# Altium PCB PCB_AUPWSC.PcbDoc
Units mm, origin at the board's own origin, x right, y up, seen from the top; angles counter-clockwise.
Board outline 55 x 45 mm, 4 copper layers (L1, L2, L3, L4), stack 0.603 mm thick; 47 components, 20 nets, 119 pads, 32 vias.
Unrouted connection lines stored in the file: 1.
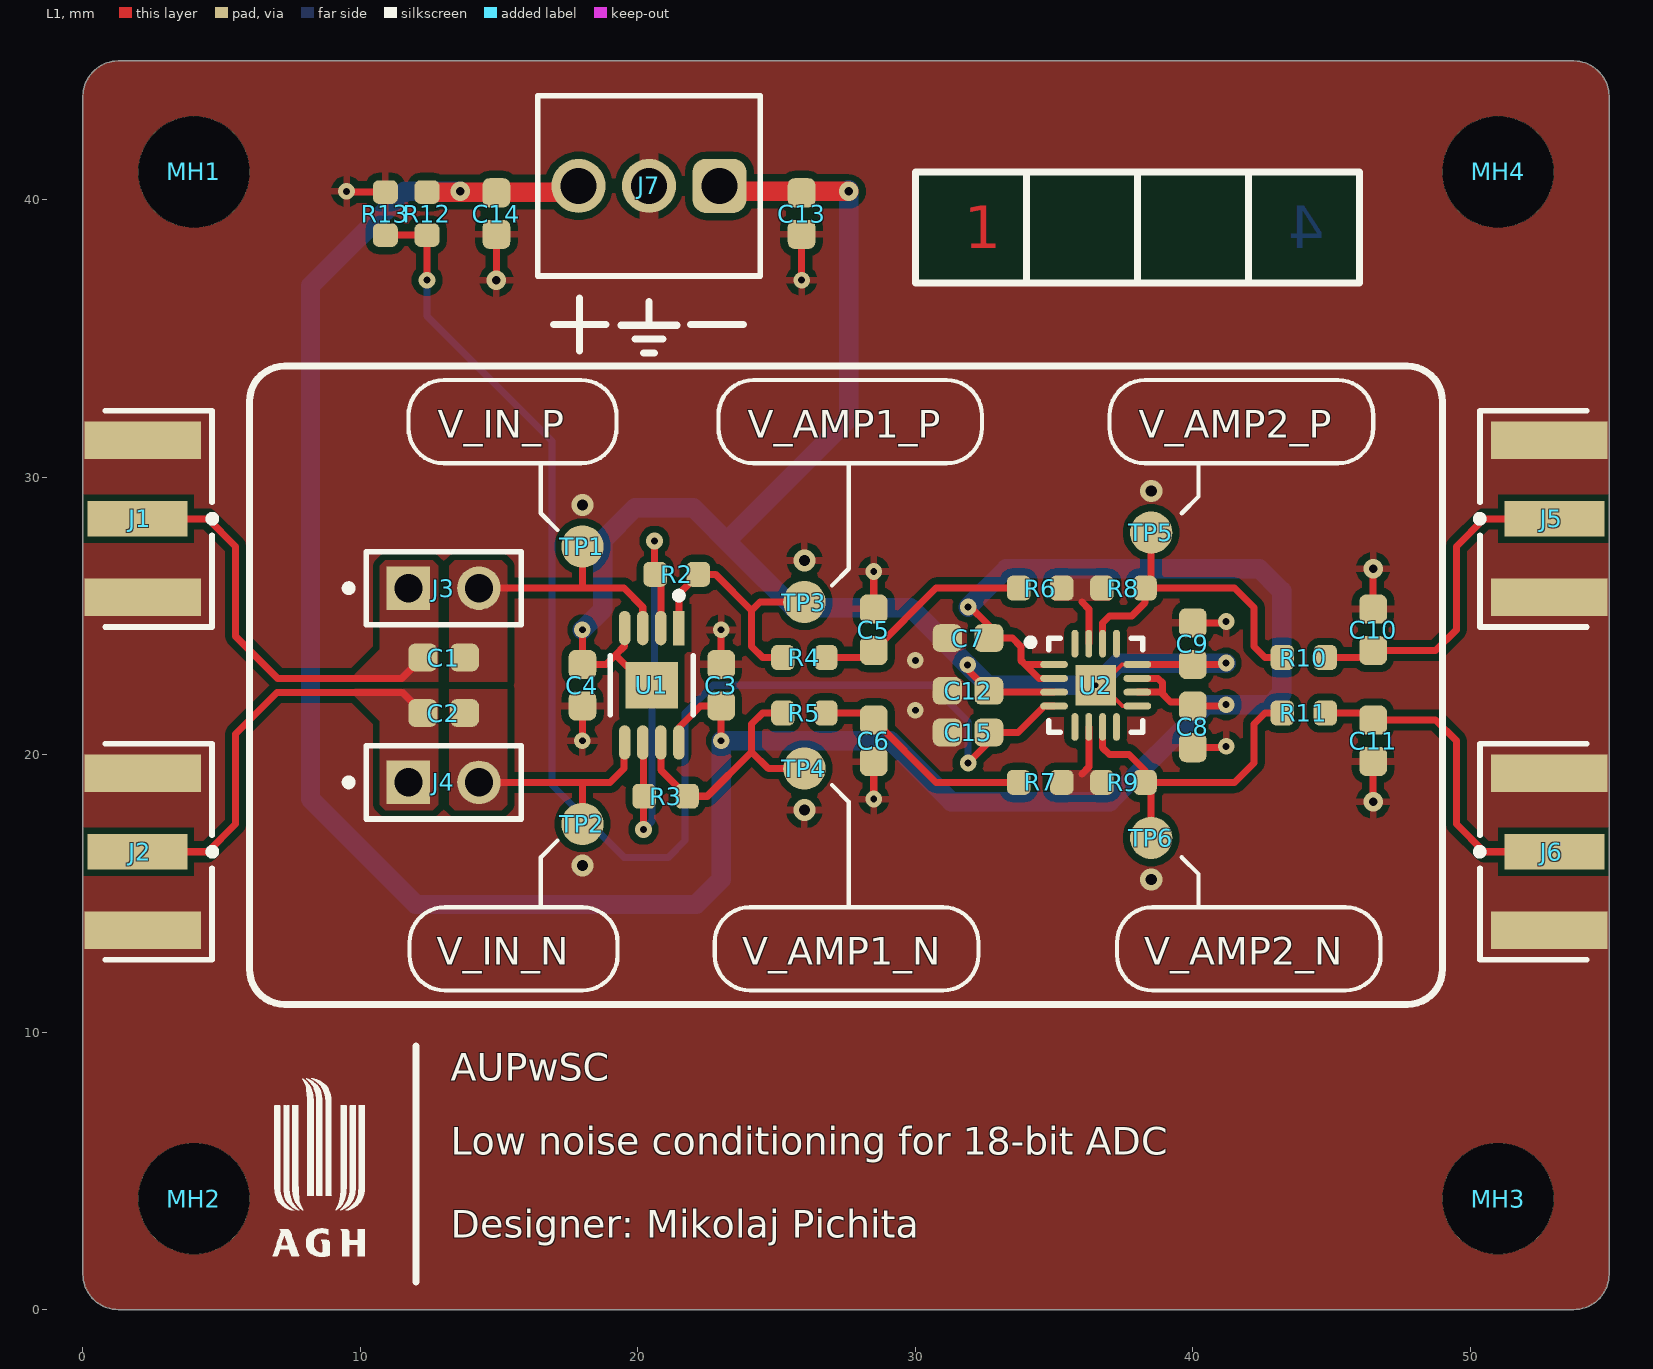
[diagram p0: L1 view]
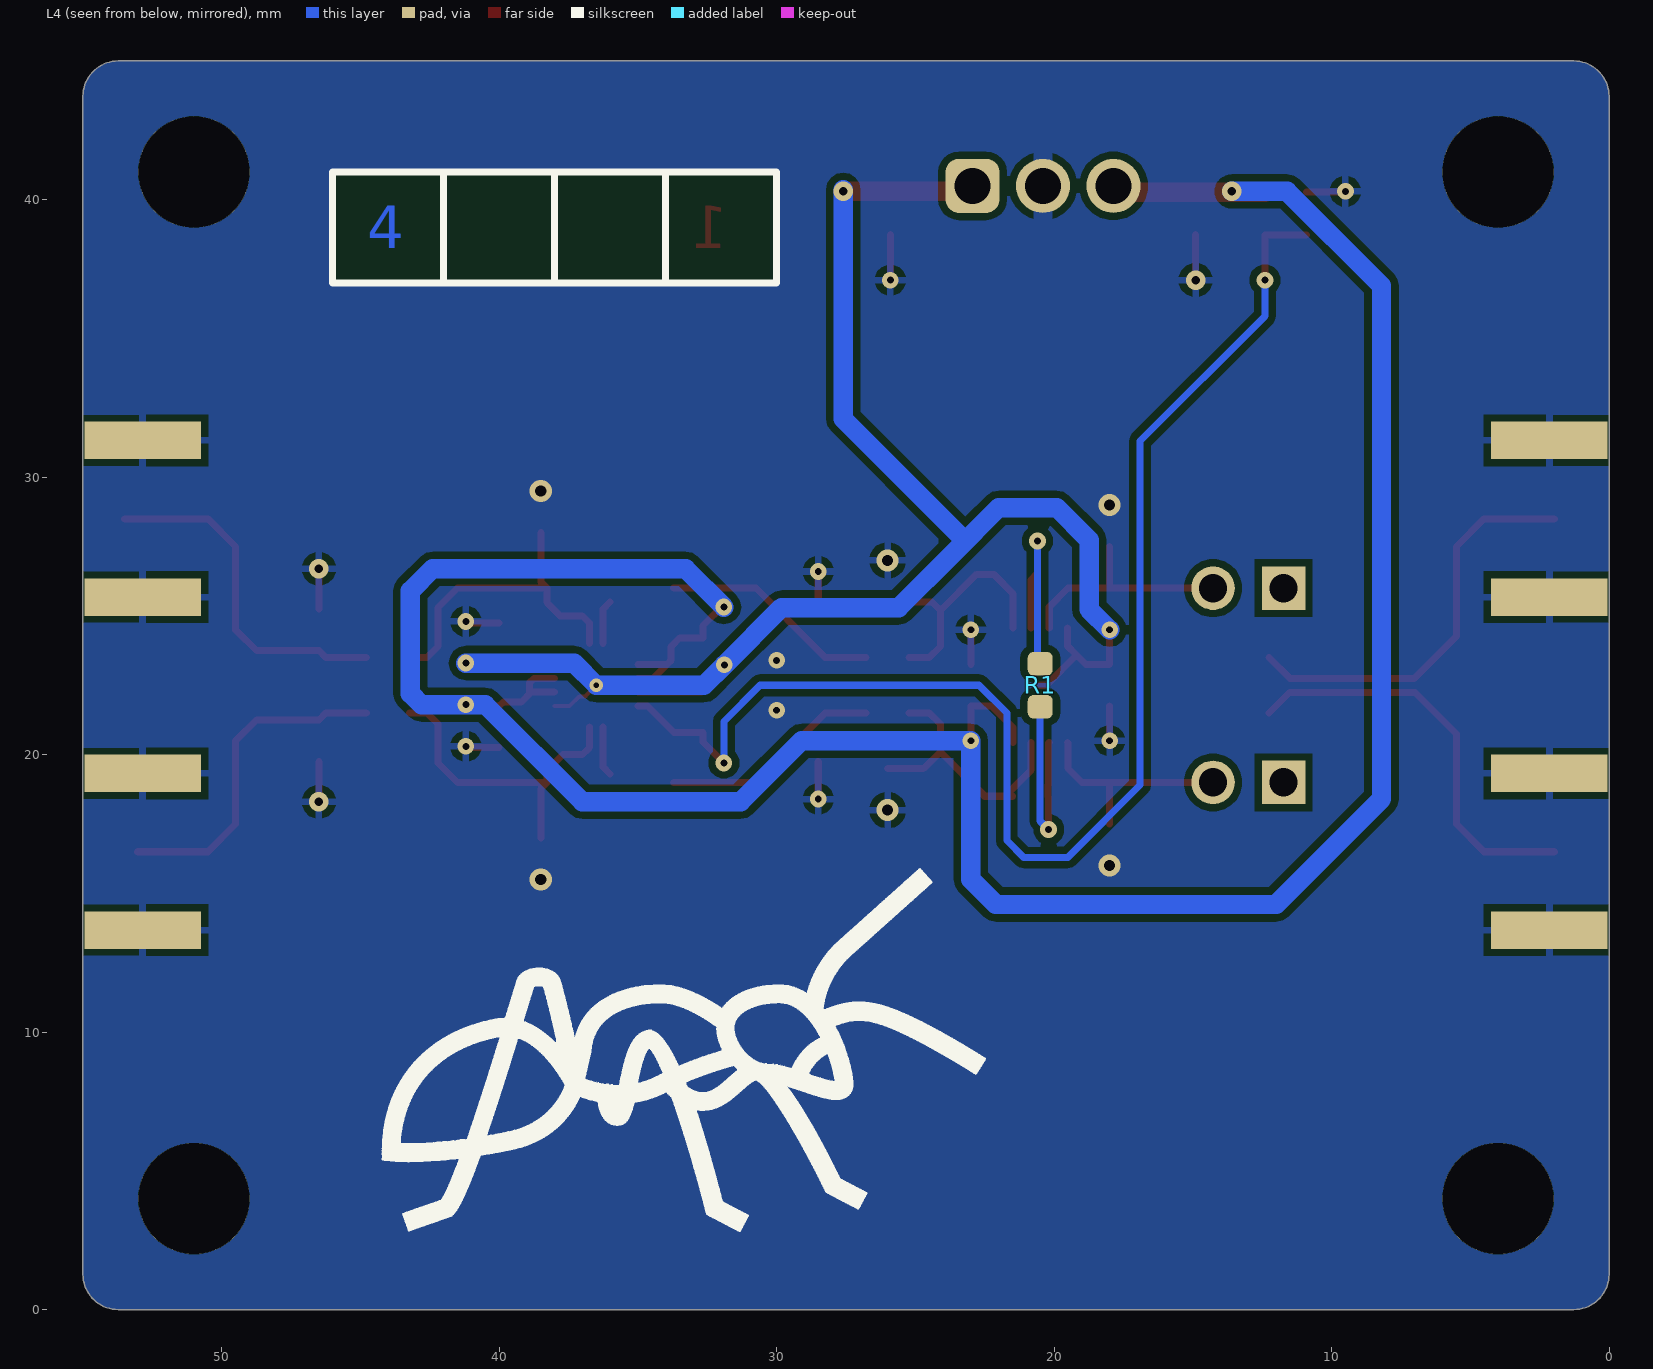
[diagram p1: L4 view, seen from below]
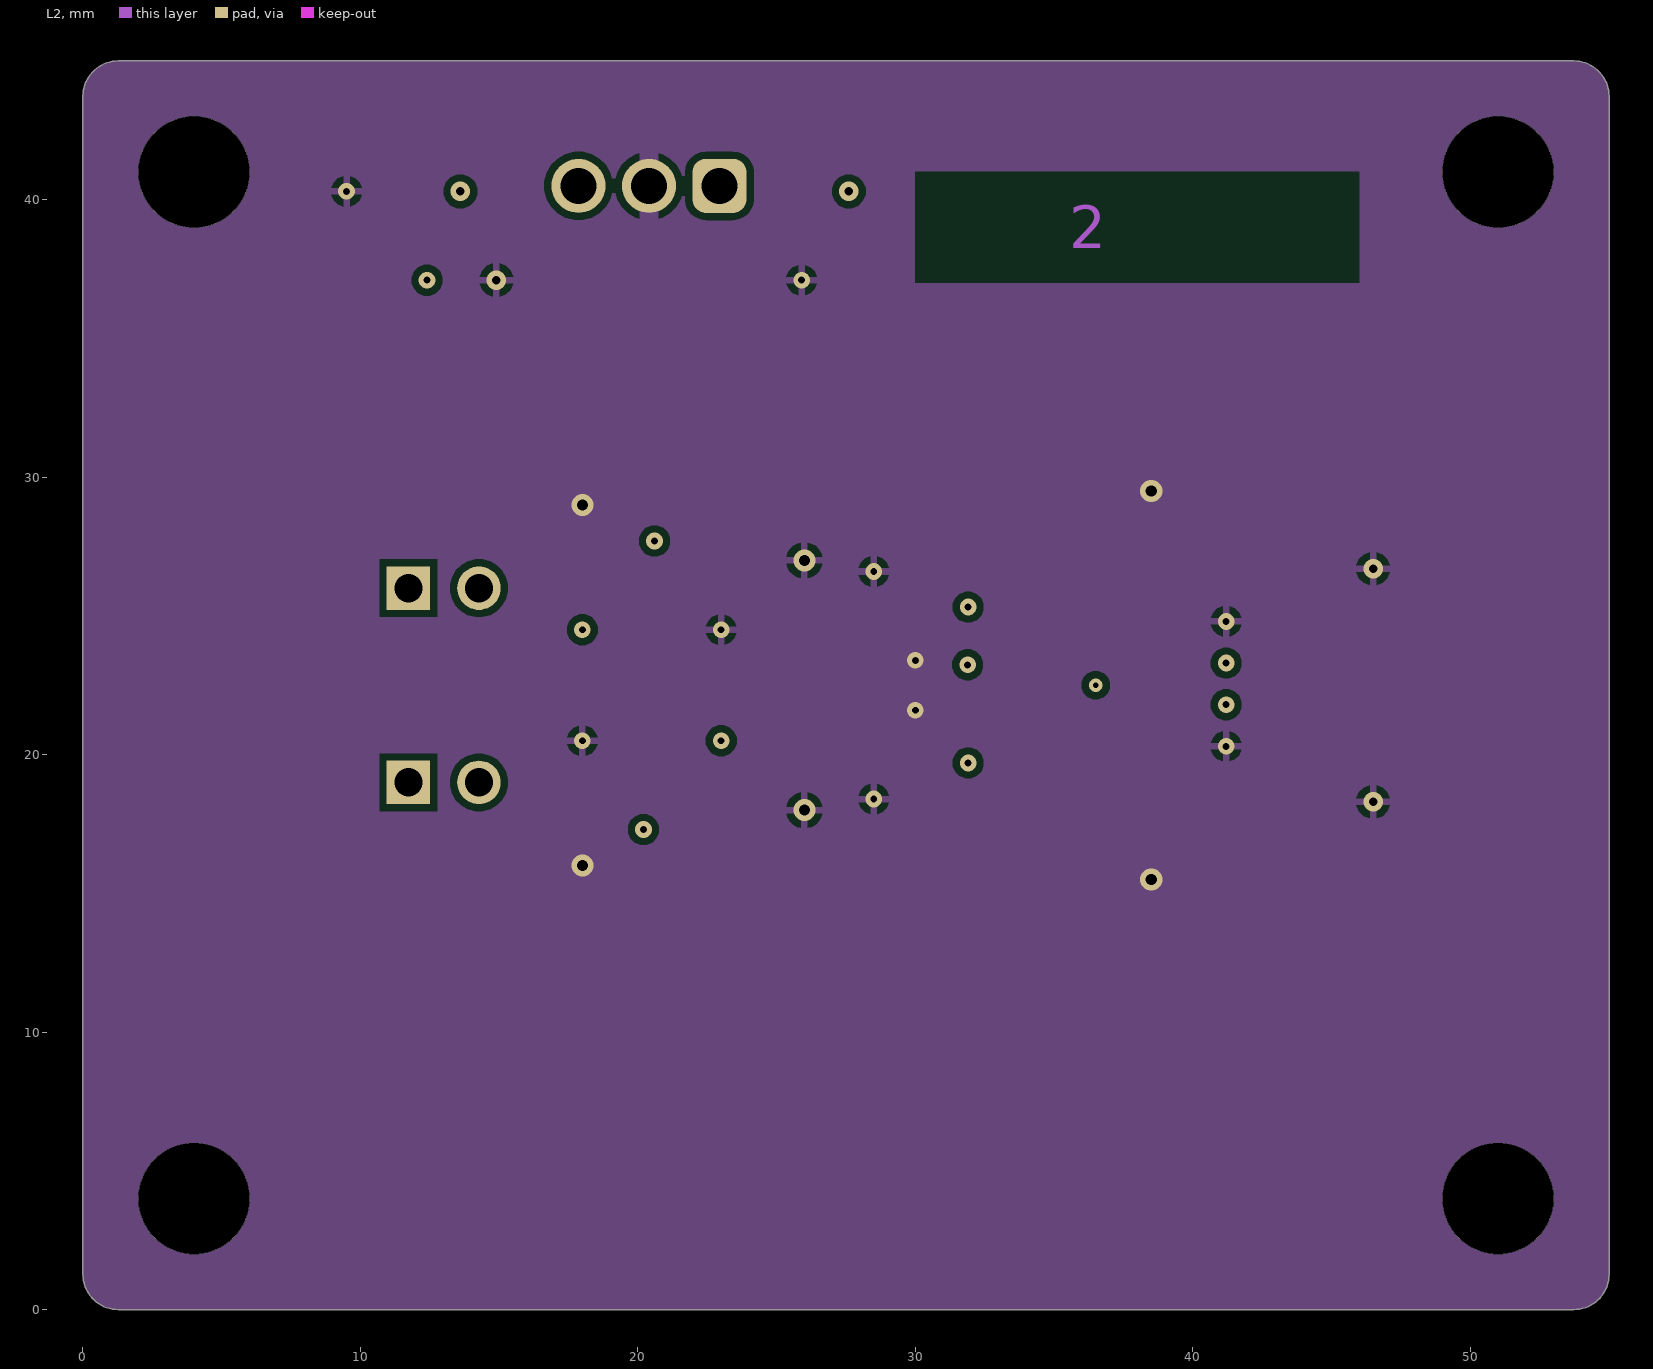
[diagram p2: L2]
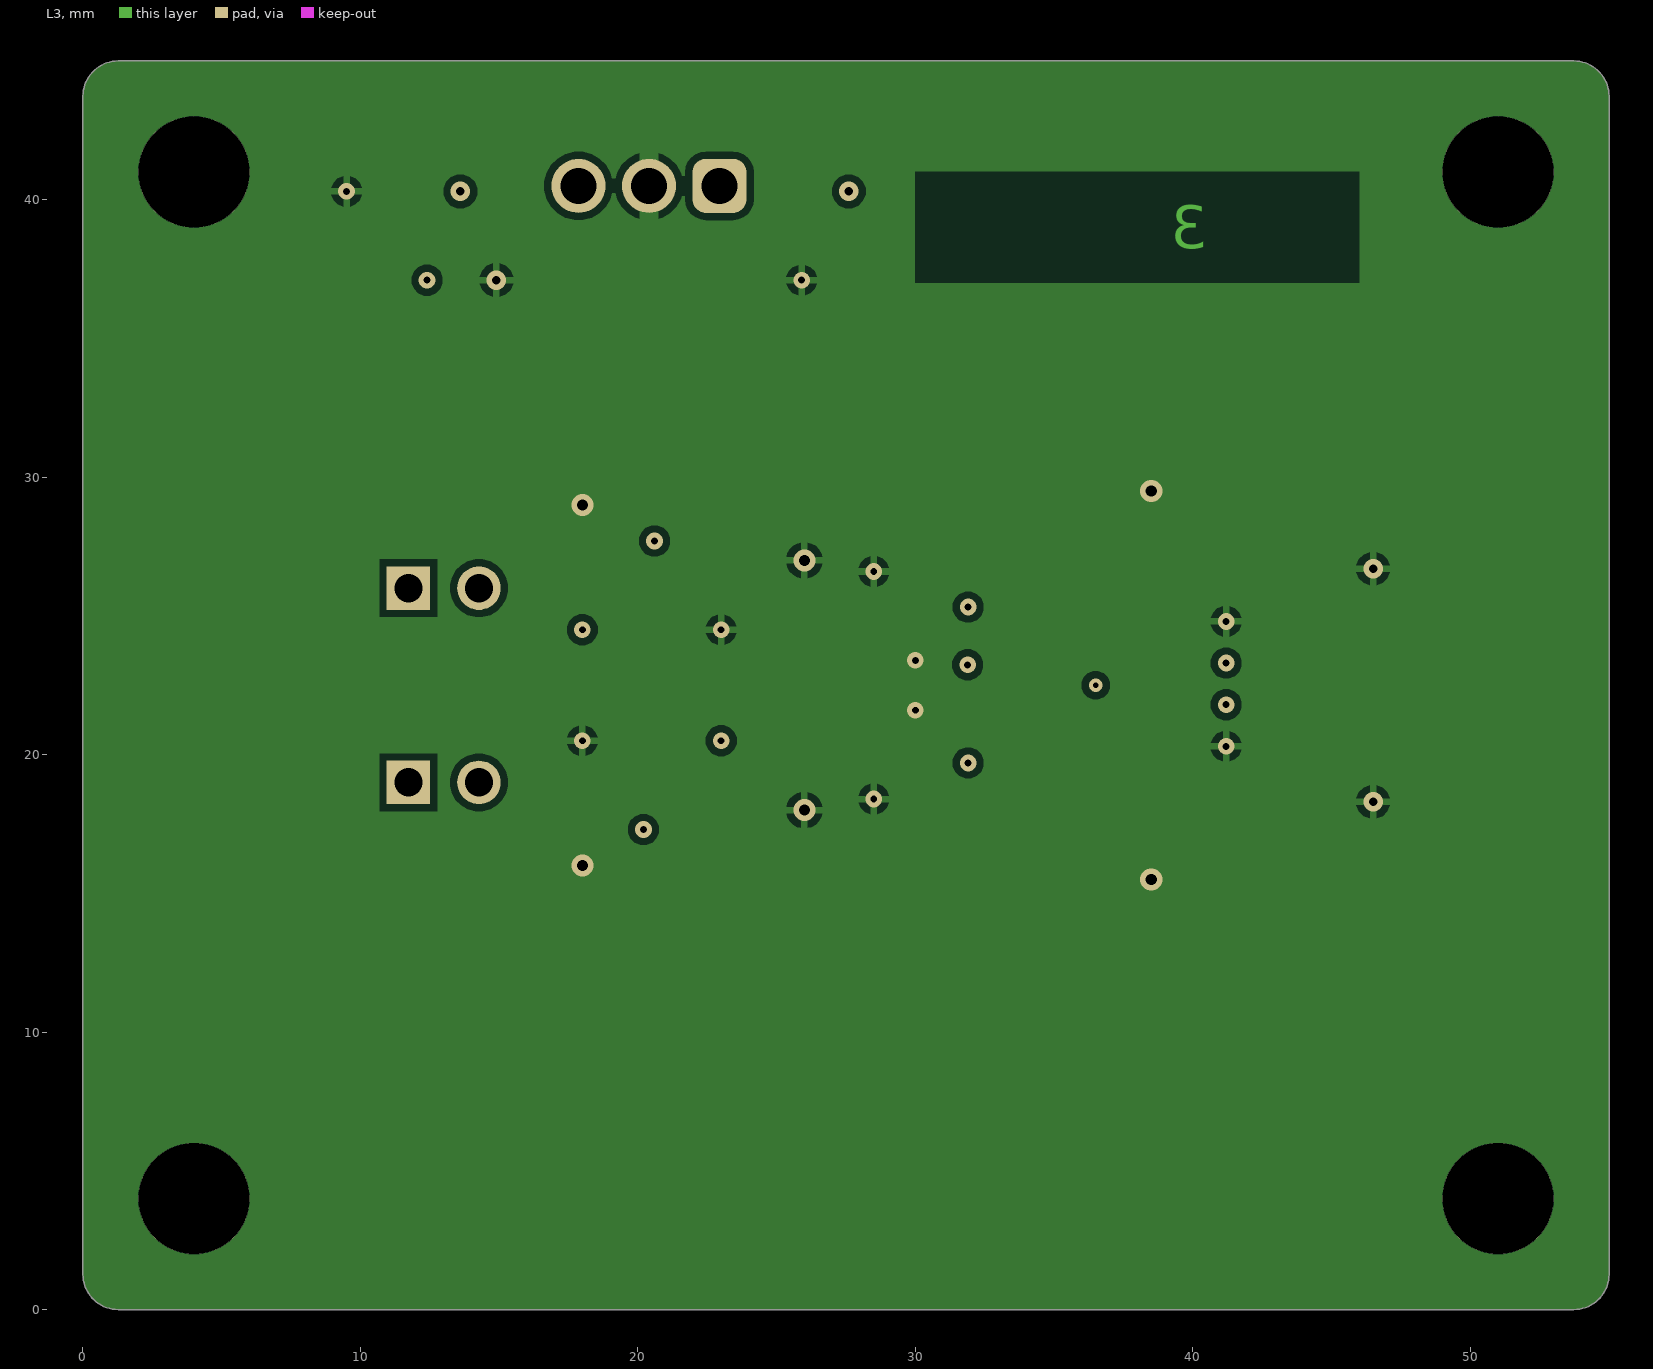
[diagram p3: L3]
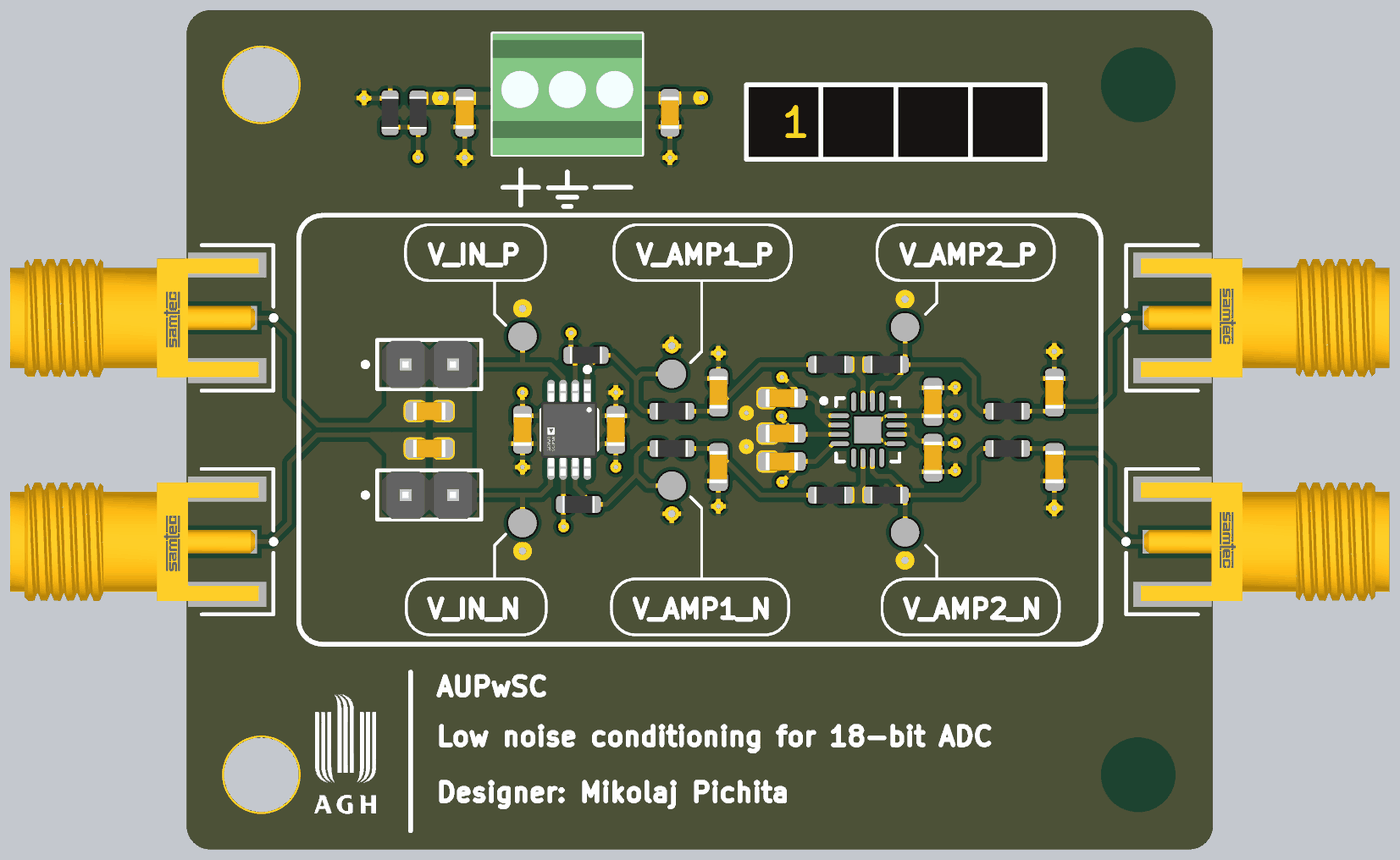
[diagram p4: 3D render of the assembled board from above, using the file's embedded part models]

## Layer stack, top to bottom
Top Solder: solder mask 0.0102, Solder Resist, Dk 3.5
L1: signal copper 0.035
Dielectric 2: prepreg 0.0711, PP-006, Dk 4.1
L2: signal copper 0.0356
Dielectric 1: dielectric 0.32, FR-4, Dk 4.8
L3: signal copper 0.0356
Dielectric 3: prepreg 0.0711, PP-006, Dk 4.1
L4: signal copper 0.035
Bottom Solder: solder mask 0.0102, Solder Resist, Dk 3.5

## Board outline
0,1.27 0,43.73 cw(c1.27,43.73) 1.27,45 53.73,45 cw(c53.73,43.73) 55,43.73 55,1.27 cw(c53.73,1.27) 53.73,0 1.27,0 cw(c1.27,1.27)

## Design rules (kind name [scope] priority, off if disabled: settings)
Clearance Clearance_1 [All] p1: gap=0.254 ignorepadtopadclearanceinfootprint=TRUE except(0: Arc-Hole Track-Hole SMDPad-Hole THPad-Hole Via-Hole Fill-Hole Poly-Hole Region-Hole Text-Hole Hole-Hole; 0.2: Arc-Arc Arc-Track Arc-SMDPad Arc-Text Track-Track Track-SMDPad Track-Text SMDPad-Text Text-Text)
Clearance Clearance_1 [(ExistsOnLayer('L2') Or ExistsOnLayer('L3')) vs (ExistsOnLayer('L2') Or ExistsOnLayer('L3'))] p2: gap=0.254 ignorepadtopadclearanceinfootprint=FALSE sourcerule=40 cellrowname=All cellrowtype=0 cellcolname=All cellcoltype=0 innerlayers=TRUE
Clearance Clearance_2 [(ExistsOnLayer('L1') Or ExistsOnLayer('L4')) vs (ExistsOnLayer('L1') Or ExistsOnLayer('L4'))] p3: gap=0.254 ignorepadtopadclearanceinfootprint=FALSE sourcerule=40 cellrowname=All cellrowtype=0 cellcolname=All cellcoltype=0 outerlayers=TRUE
Clearance [All] p4: gap=0.254 ignorepadtopadclearanceinfootprint=FALSE ismatrix=TRUE
DiffPairsRouting DifferentialPairsRouting_1 [All] p1: maxlimit=15 minlimit=0.254 mostfreqgap=0.254 toplayer_minwidth=0.254 toplayer_maxwidth=0.254 toplayer_prefwidth=0.254 midlayer1_maxgap=0.254 midlayer1_minwidth=0.381 midlayer1_maxwidth=0.381 midlayer1_prefwidth=0.381 midlayer2_maxgap=0.254 midlayer2_minwidth=0.381 midlayer2_maxwidth=0.381 midlayer2_prefwidth=0.381 bottomlayer_minwidth=0.254 bottomlayer_maxwidth=0.254 bottomlayer_prefwidth=0.254 maxuncoupledlength=15
DiffPairsRouting [All] p2: maxlimit=0.254 minlimit=0.254 mostfreqgap=0.254 toplayer_minwidth=0.381 toplayer_maxwidth=0.381 toplayer_prefwidth=0.381 midlayer1_minwidth=0.381 midlayer1_maxwidth=0.381 midlayer1_prefwidth=0.381 midlayer2_minwidth=0.381 midlayer2_maxwidth=0.381 midlayer2_prefwidth=0.381 bottomlayer_minwidth=0.381 bottomlayer_maxwidth=0.381 bottomlayer_prefwidth=0.381 maxuncoupledlength=12.7
PolygonConnect [All] p1: connectstyle=Relief reliefconductorwidth=0.254 reliefentries=4 polygonreliefangle="90 Angle" airgapwidth=0.254
RoutingVias RoutingViaStyle_1 [All] p1: holewidth=0.25 width=0.6 viastyle="Through Hole" minholewidth=0.2 minwidth=0.5 maxholewidth=0.3 maxwidth=0.7
RoutingVias [All] p2: holewidth=0.711 width=1.27 viastyle="Through Hole" minholewidth=0.711 minwidth=1.27 maxholewidth=0.711 maxwidth=1.27
SolderMaskExpansion [All] p1: expansion=0.102 istentingtop=FALSE
Width MaxMinWidth_1 [All] p1: maxlimit=0.7 minlimit=0.15 preferedwidth=0.254 midlayer1_minwidth=0.254 midlayer1_maxwidth=0.254 midlayer2_minwidth=0.254 midlayer2_maxwidth=0.254 minimp=50.000000 maximp=50.000000 favimp=50.000000
Width [All] p2: maxlimit=0.254 minlimit=0.254 preferedwidth=0.254
29 further rules are at their usual default settings.

## Classes and differential pairs
differential pair Vout: +Vout_P -Vout_N
differential pair Vin: +Vin_P -Vin_N
differential pair Vin-coupled: +Vin-coupled_P -Vin-coupled_N
differential pair V-fltr1: +V-fltr1_P -V-fltr1_N
differential pair V-2nd-out: +V-2nd-out_P -V-2nd-out_N
differential pair V-2nd-in: +V-2nd-in_N -V-2nd-in_P
differential pair V-1st: +V-1st_N -V-1st_P

## Components (designator, comment, footprint, x,y, rotation, side; value= is the part's Value field where it differs from the comment)
C1 "10n" CAP0603 13,23.5 r0 top
C2 "10n" CAP0603 13,21.5 r0 top
C3 "100n" CAP0603 23,22.5 r90 top
C4 "100n" CAP0603 18,22.5 r270 top
C5 "85p" CAP0603 28.5,24.5 r270 top
C6 "85p" CAP0603 28.5,20.5 r90 top
C7 "100n" CAP0603 31.9,24.2 r180 top
C8 "100n" CAP0603 40,21 r270 top
C9 "100n" CAP0603 40,24 r90 top
C10 "85p" CAP0603 46.5,24.5 r270 top
C11 "85p" CAP0603 46.5,20.5 r90 top
C12 "100n" CAP0603 31.9,22.3 r180 top
C13 "4u7" CAP0603 25.9,39.5 r90 top
C14 "4u7" CAP0603 14.9,39.5 r270 top
C15 "10n" CAP0603 31.9,20.8 r180 top
J1 "SMA-J-P-H-ST-EM1" FP-SMA-J-P-H-ST-EM1-MFG -4.7,28.5 r270 top
J2 "SMA-J-P-H-ST-EM1" FP-SMA-J-P-H-ST-EM1-MFG -4.7,16.5 r270 top
J3 "*" JUMPER 13,26 r0 top
J4 "*" JUMPER 13,19 r0 top
J5 "SMA-J-P-H-ST-EM1" FP-SMA-J-P-H-ST-EM1-MFG 59.7,28.5 r90 top
J6 "SMA-J-P-H-ST-EM1" FP-SMA-J-P-H-ST-EM1-MFG 59.7,16.5 r90 top
J7 "691210910003" 691210910003 20.4,40.5 r180 top
MH1 "M3" MountingHole#1 4,41 r0 top
MH2 "M3" MountingHole#1 4,4 r0 top
MH3 "M3" MountingHole#2 66,4 r0 top
MH4 "M3" MountingHole#2 66,41 r0 top
R1 "25R" RES0603 20.5,22.5 r270 bottom
R2 "500R" RES0603 21.4,26.5 r0 top
R3 "500R" RES0603 21,18.5 r0 top
R4 "250R" RES0603 26,23.5 r0 top
R5 "250R" RES0603 26,21.5 r180 top
R6 "250R" RES0603 34.5,26 r0 top
R7 "250R" RES0603 34.5,19 r180 top
R8 "5k" RES0603 37.5,26 r0 top
R9 "5k" RES0603 37.5,19 r0 top
R10 "250R" RES0603 44,23.5 r0 top
R11 "250R" RES0603 44,21.5 r180 top
R12 "1k" RES0603 12.4,39.5 r90 top
R13 "1k4" RES0603 10.9,39.5 r270 top
TP1 "Testpoint" SMD_TESTPOINT 18,27.5 r0 top
TP2 "Testpoint" SMD_TESTPOINT 18,17.5 r90 top
TP3 "Testpoint" SMD_TESTPOINT 26,25.5 r90 top
TP4 "Testpoint" SMD_TESTPOINT 26,19.5 r90 top
TP5 "Testpoint" SMD_TESTPOINT 38.5,28 r90 top
TP6 "Testpoint" SMD_TESTPOINT 38.5,17 r90 top
U1 "LTC6229HMS8E#PBF" FP-MS8E-8-05-08-1662-IPC_C 20.5,22.5 r270 top
U2 "LTC6404HUD-1#PBF" LT-UD-16_M 36.5,22.5 r0 top

## Footprints (in the part's own frame and the unit in brackets; to place one, negate y for a bottom-side part, rotate by r counter-clockwise, add the part's x,y. Pads: shape width x height; smd on the part's side, far side on the other; paste and mask are expansions set on the pad)
691210910003 [mm] "2,54mm - modular - green - Horizontal wire entry - Cage clamp - 0,8mm2 wires - 03p"
  rrect50% 1.95x1.95 hole 1.3: 1(-2.54,0)
  round 1.95 hole 1.3: 2(0,0) 3(2.54,0)
  silkscreen extent -4.01,-3.25 4.01,3.25, body extent -4.01,-3.25 4.01,3.25, height 8.55
CAP0603 [mm] "Chip Capacitor, 2-Leads, Body 1,60x0,81mm, IPC Medium Density"
  rrect50% 1.05x1 smd: 1(-0.75,0) 2(0.75,0)
  body extent -0.87,-0.48 0.87,0.48, height 0.6
FP-MS8E-8-05-08-1662-IPC_C [mm]
  rect 1.24x0.415 smd paste+0 mask+0: 1(-2.06,0.975)
  rrect100% 1.24x0.415 smd paste+0 mask+0: 2(-2.06,0.325) 3(-2.06,-0.325) 4(-2.06,-0.975) 5(2.06,-0.975) 6(2.06,-0.325) 7(2.06,0.325) 8(2.06,0.975)
  rect 1.68x1.88 smd paste-1000 mask+0: 9(0,0)
  silkscreen extent -3.35,-1.5 1.06,1.5, body extent -2.78,-1.6 2.78,1.6, height 0.25
FP-SMA-J-P-H-ST-EM1-MFG [mm]
  rect 1.27x3.6 smd paste+0 mask+0: 1(0,6.66)
  rect 1.35x4.2 smd paste+0 mask+0: 2(-2.825,6.86) 3(2.825,6.86)
  rect 1.35x4.2 smd far side paste+0 mask+0: 4(-2.825,6.86) 5(2.825,6.86)
  silkscreen extent -3.9,5.5 3.9,9.49, body extent -3.6,-4.92 3.6,9.06, height 0.25
JUMPER [mm]
  rect 1.57x1.57 hole 1.02 paste-1000 mask+0: 1(-1.27,0)
  round 1.57 hole 1.02 paste-1000 mask+0: 2(1.27,0)
  silkscreen extent -3.55,-1.32 2.79,1.32, body extent -2.89,-1.42 2.89,1.42, height 0.25
LT-UD-16_M [mm] "QFN, 16-Leads, Body 3x3mm, Pitch 0.5mm, Thermal Pad 1.45x1.45mm, IPC Low Density"
  oval 1x0.25 smd: 1(-1.5,0.75) 2(-1.5,0.25) 3(-1.5,-0.25) 4(-1.5,-0.75) 9(1.5,-0.75) 10(1.5,-0.25) 11(1.5,0.25) 12(1.5,0.75)
  oval 0.25x1 smd: 5(-0.75,-1.5) 6(-0.25,-1.5) 7(0.25,-1.5) 8(0.75,-1.5) 13(0.75,1.5) 14(0.25,1.5) 15(-0.25,1.5) 16(-0.75,1.5)
  rect 1.45x1.45 smd: 17(0,0)
  silkscreen extent -2.47,-1.7 1.7,1.7, body extent -1.55,-1.55 1.55,1.55, height 0.8
MountingHole#1 [mm]
  round 4 hole 4 unplated: 1(0,0)
MountingHole#2 [mm]
  round 4 hole 4 unplated: 1(-15,0)
RES0603 [mm] "Chip Resistor, 2-Leads, Body 1,60x0,80mm, IPC Medium Density"
  rrect50% 0.85x0.9 smd: 1(-0.775,0) 2(0.775,0)
  body extent -0.85,-0.45 0.85,0.45, height 0.55
SMD_TESTPOINT [mil]
  round 60 smd: 1(0,0)

## Part data
C1 C2 C3 C4 C5 C6 C7 C8 C9 C10 C11 C12 C13 C14 C15: library part Capacitor
J1 J2 J5 J6: library part CMP-02754-000006-1, "CONN SMA JACK STR 50OHM EDGE MNT", Case/Package=SMA, Dielectric Material=PTFE, Housing Color=Gold, Max Frequency=6GHz, Max Operating Temperature=125°C, Min Operating Temperature=-65°C, Package Quantity=1, Voltage Rating=335V, Body Material=Brass, Body Plating=Gold, Center Contact Plating=Gold, Connector Type=SMA, Contact Material=Copper, Contact Plating=Gold, Depth=13.33mm, Fastening Type=Threaded, Impedance=50R, Insulation Material=Polytetrafluoroethylene, Length=6.35mm, Mount=Edge, Orientation=Straight, Packaging=Tray, Radiation Hardening=No, RoHS Compliant=Yes, Series=SMA, Termination=Solder
J3 J4: library part Jumper
J7: library part CMP-1502-02457-2, NexarPartId=105950650
MH1 MH2 MH3 MH4: library part "Mounting hole"
R1 R2 R3 R4 R5 R6 R7 R8 R9 R10 R11 R12 R13: library part Resistor
TP1 TP2 TP3 TP4 TP5 TP6: library part SMD_testpoint
U1: library part CMP-09116-000250-1, "IC OPAMP GP 1 CIRCUIT 8MSOP", RoHS Compliant=Yes
U2: "High Speed Operational Amplifiers 600MHz, L N, Hi Prec Fully Diff In/Out A"

## Via types
v1: diameter 0.6, hole 0.25, L1 to L4, 20 vias
v2: diameter 0.8, hole 0.4, L1 to L4, 6 vias
v3: diameter 0.7, hole 0.3, L1 to L4, 5 vias
v4: diameter 0.5, hole 0.2, L1 to L4, 1 vias

## Nets (pads, with @x,y where several pads share a name; then routed paths per layer and width w, separated by ;. In a path a pad name is that pad's centre, name@x,y a point inside that pad or via, vN(x,y) a via of type N, cw(c..) or ccw(c..) an arc to the next point about the centre after c; other vN are vias at no path point)
+5V: C3.1 C7.1 C8.1 C14.1 J7.3 R12.2 U1.8 U2.1 U2.2 U2.10 U2.11 | length 105.5
  L1 w0.254: U1.8 21.475,20.975 22.25,21.75 C3.1 v1(23,20.5) ; v1(31.9,25.319) 31.9,25.4 32.65,24.65 C7.1 33.5,24.2 33.8,23.9 33.8,23.4 33.95,23.25 ; U2.2 34.45,22.75 33.95,23.25 ; U2.1 33.95,23.25 ; U2.10 38.85,22.25 ; U2.11 38.75,22.75 38.9,22.6 38.9,22.3 38.85,22.25 ; v1(41.2,21.8) 41.15,21.75 C8.1 39.85,21.9 39.2,21.9 38.85,22.25
  L1 w0.7: R12.2 17.635,40.275 J7.3
  L4 w0.7: v3(13.6,40.3) 11.6,40.3 8.2,36.9 8.2,18.4 12,14.6 22.1,14.6 23,15.5 v1(23,20.5) 29.1,20.5 31.3,18.3 37,18.3 40.5,21.8 v1(41.2,21.8) 42.8,21.8 43.2,22.2 43.2,25.9 42.4,26.7 33.281,26.7 v1(31.9,25.319)
-5V: C4.1 C9.1 C12.1 C13.2 J7.1 U1.4 U1.9 U2.3 U2.9 U2.12 U2.17 | length 64.1
  L1 w0.15: U2.9 37.465,21.75 37.115,22.1 36.9,22.1 v4(36.5,22.5) 36.8,22.8 37,22.8 37.45,23.25 U2.12
  L1 w0.254: v1(18,24.5) C4.1 18.85,23.25 19.188,23.588 ; U1.4 19.525,23.925 19.188,23.588 ; U1.9 20.275,22.5 19.188,23.588 ; J7.1 J7.1@23.15,40.29 ; v1(31.883,23.236) 31.883,23.067 C12.1 32.7,22.25 U2.3 ; U2.12 C9.1 41.15,23.25 v1(41.2,23.3)
  L1 w0.7: J7.1@23.15,40.29 J7.1@23.16,40.3 ; J7.1@23.66,40.3 v3(27.6,40.3)
  L4 w0.7: v1(18,24.5) 18.736,25.236 18.736,27.736 19.9,28.9 22,28.9 23.65,27.25 25.6,25.3 29.819,25.3 v1(31.883,23.236) 32.619,22.5 v4(36.5,22.5) 37.3,23.3 v1(41.2,23.3) ; 23.2,27.7 27.6,32.1 v3@27.6,40.361
fb-neg: R1.2 R3.1 U1.6 | length 7.7
  L1 w0.254: U1.6 20.2,20.415 20.2,18.925 20.225,18.9 R3.1 ; v1(20.2,17.3) R3.1@20.2,18.475
  L4 w0.254: v1(20.2,17.3) 20.5,17.6 R1.2
fb-pos: R1.1 R2.1 U1.2 | length 7.5
  L1 w0.254: R2.1@20.6,26.525 v1(20.6,27.7) ; R2.1 20.825,26.3 U1.2
  L4 w0.254: R1.1@20.6,23.375 v1(20.6,27.7)
GND: C3.2 C4.2 C5.1 C6.1 C7.2 C8.2 C9.2 C10.1 C11.1 C12.2 C13.1 C14.2 C15.2 J1.2 J1.3 J1.4 J1.5 J2.2 J2.3 J2.4 J2.5 J5.2 J5.3 J5.4 J5.5 J6.2 J6.3 J6.4 J6.5 J7.2 R13.1 | length 15.3
  L1 w0.254: v1(9.5,40.3) 9.525,40.275 R13.1 ; v3(14.9,37.1) C14.2 ; v1(18,20.5) C4.2 ; C3.2 v1(23,24.5) ; v1(25.9,37.1) C13.1 ; v1(28.5,18.4) C6.1 ; C5.1 v1(28.5,26.6) ; C8.2 41.15,20.25 v1(41.2,20.3) ; C9.2 41.15,24.75 v1(41.2,24.8) ; v3(46.5,18.3) C11.1 ; C10.1 v3(46.5,26.7)
  other v1: 30,21.6 30,23.4
  other v2: 38.5,15.5 18,16 26,18 26,27 18,29 38.5,29.5
V-1st_N: R3.2 R5.2 TP4.1 U1.7 | length 10
  L1 w0.254: U1.7 20.825,19.45 R3.2 ; R3.2@21.5,18.5 R3.2 ; R5.2 24.5,21.5 24.1,21.1 24.1,20.1 ; TP4.1 24.7,19.5 24.1,20.1 ; R3.2 22.5,18.5 24.1,20.1
V-1st_P: R2.2 R4.1 TP3.1 U1.1 | length 9.3
  L1 w0.254: U1.1 21.475,25.8 R2.2 22.8,26.5 24.1,25.2 ; R4.1 24.5,23.5 24.1,23.9 24.1,25.2 ; TP3.1 24.4,25.5 24.1,25.2
V-2nd-in_N: R7.1 R9.1 U2.6 | length 1.8
  L1 w0.254: 36,19.3 36.25,19.55 U2.6
V-2nd-in_P: R6.2 R8.1 U2.15 | length 1.6
  L1 w0.254: 36,25.5 36.25,25.25 U2.15
V-2nd-out_N: R9.2 R11.2 TP6.1 U2.7 | length 11.9
  L1 w0.254: U2.7 36.75,20.25 37,20 37.7,20 38.275,19.425 R9.2 ; TP6.1 38.5,18.775 R9.2 ; R11.2 42.6,21.5 42.2,21.1 42.2,19.7 41.5,19 R9.2
V-2nd-out_P: R8.2 R10.1 TP5.1 U2.14 | length 12.3
  L1 w0.254: U2.14 36.75,24.75 37,25 37.8,25 38.275,25.475 R8.2 ; TP5.1 38.5,26.225 R8.2 ; R10.1@43.225,23.775 R10.1 42.6,23.5 42.2,23.9 42.2,25.3 41.5,26 R8.2
V-fltr1_N: C6.2 R5.1 R7.2 | length 8
  L1 w0.254: R5.1 28.25,21.5 C6.2 30.75,19 R7.2
V-fltr1_P: C5.2 R4.2 R6.1 | length 8
  L1 w0.254: R4.2 28.25,23.5 C5.2 30.75,26 R6.1
VCM: C15.1 R12.1 R13.2 U2.4 | length 50.7
  L1 w0.254: R13.2 R12.1 v1(12.4,37.1) ; v1(31.9,19.7) 32.65,20.45 C15.1 33.7,20.8 34.65,21.75 U2.4
  L4 w0.254: v1(12.4,37.1) 12.4,35.802 16.9,31.302 16.9,18.9 19.5,16.3 21.1,16.3 21.7,16.9 21.7,21.5 22.7,22.5 30.6,22.5 31.9,21.2 v1(31.9,19.7)
Vin-coupled_N: C2.2 J4.2 TP2.1 U1.5 | length 7.9
  L1 w0.254: J4.2 18,19 ; TP2.1 18,19 ; U1.5 19.5,20.415 19.5,19.5 19,19 18,19
Vin-coupled_P: C1.2 J3.2 TP1.1 U1.3 | length 9.1
  L1 w0.254: J3.2@14.67,26.4 J3.2 17.9,26 ; TP1.1 18,26.1 17.9,26 ; U1.3 20.175,25.325 19.5,26 17.9,26
Vin_N: C2.1 J2.1 J4.1 | length 14.9
  L1 w0.254: J2.1 4.5,16.5 5.5,17.5 5.5,20.746 6.987,22.233 11.517,22.233 C2.1
Vin_P: C1.1 J1.1 J3.1 | length 14.9
  L1 w0.254: J1.1 4.5,28.5 5.5,27.5 5.5,24.267 7.016,22.752 11.502,22.752 C1.1
Vout_N: C11.2 J6.1 R11.1 | length 12.1
  L1 w0.254: R11.1 46.25,21.5 C11.2 48.75,21.25 49.5,20.5 49.5,17.5 50.5,16.5 J6.1
Vout_P: C10.2 J5.1 R10.2 | length 12.6
  L1 w0.254: R10.2 46.25,23.5 C10.2 48.75,23.75 49.5,24.5 49.5,27.5 50.5,28.5 J5.1 J5.1@53.5,28.5
pads on no net: MH1.1 MH2.1 MH3.1 MH4.1 U2.5 U2.8 U2.13 U2.16

## Polygon pours and split planes (outlines as drawn)
GND on L1 "GND_L01_P012" (solid, pour order 12): 0,43.7 cw(c1.3,43.7) 1.3,45 53.7,45 cw(c53.7,43.7) 55,43.7 55,1.3 cw(c53.7,1.3) 53.7,0 1.3,0 cw(c1.3,1.3) 0,1.3
Vin_N on L1 "VIN_N_L01_P002" (solid, pour order 2): 12.8,22.368 9.8,22.368 9.8,22.1 10.7,21.2 10.7,18.2 10.9,18 12.6,18 12.8,18.2
Vin_P on L1 "VIN_P_L01_P003" (solid, pour order 3): 12.8,22.622 9.8,22.622 9.8,22.9 10.7,23.8 10.7,26.8 10.9,27 12.6,27 12.8,26.8
Vin-coupled_P on L1 "VIN-COUPLED_P_L01_P004" (solid, pour order 4): 13.2,22.622 15.3,22.622 15.3,23.8 15.3,26.8 15.1,27 13.4,27 13.2,26.8
Vin-coupled_N on L1 "VIN-COUPLED_N_L01_P005" (solid, pour order 5): 13.2,22.378 15.3,22.378 15.3,21.2 15.3,18.2 15.1,18 13.4,18 13.2,18.2
GND on L1 "GND_L01_P006" (solid, pour order 6): 31.4,20.3 30.5,20.3 29.7,21.1 29.7,23.9 30.5,24.7 31.4,24.7
V-2nd-in_P on L1 "V-2ND-IN_P_L01_P008" (solid, pour order 8): 35,25.553 37,25.553 37,26.445 35,26.445
V-2nd-in_N on L1 "V-2ND-IN_N_L01_P009" (solid, pour order 9): 35,18.553 37,18.553 37,19.445 35,19.445
GND on L2 "GND_L02_P011" (solid, pour order 11): 0,43.7 cw(c1.3,43.7) 1.3,45 53.7,45 cw(c53.7,43.7) 55,43.7 55,1.3 cw(c53.7,1.3) 53.7,0 1.3,0 cw(c1.3,1.3) 0,1.3
GND on L3 "GND_L03_P013" (solid, pour order 13): 0,43.7 cw(c1.3,43.7) 1.3,45 53.7,45 cw(c53.7,43.7) 55,43.7 55,1.3 cw(c53.7,1.3) 53.7,0 1.3,0 cw(c1.3,1.3) 0,1.3
GND on L4 "GND_L04_P014" (solid, pour order 14): 0,43.7 cw(c1.3,43.7) 1.3,45 53.7,45 cw(c53.7,43.7) 55,43.7 55,1.3 cw(c53.7,1.3) 53.7,0 1.3,0 cw(c1.3,1.3) 0,1.3
no net on Top Solder "NONET_L01_P-001" (solid): 30,41 46,41 46,37 30,37
no net on Bottom Solder "NONET_L01_P-001" (solid): 30,41 46,41 46,37 30,37

## Other copper
L1:
  pour cut-out: 30,41 46,41 46,37 30,37
  text "1" at 31.754,38.254 h1.52
L2:
  pour cut-out: 30,41 46,41 46,37 30,37
  text "2" at 35.554,38.254 h1.52
L3:
  pour cut-out: 30,41 46,41 46,37 30,37
  text "3" at 40.546,38.254 h1.52
L4:
  pour cut-out: 30,41 46,41 46,37 30,37
  text "4" at 44.746,38.254 h1.52

## Silkscreen, mask and mechanical layers (free items; w line width, h text height)
Top Overlay:
  drawing of 108 lines, arcs and shapes, not listed
  text "V_IN_P" at 12.784,31.421 h1
  text "V_AMP1_P" at 23.954,31.421 h1
  text "V_AMP2_P" at 38.054,31.421 h1
  text "V_IN_N" at 12.754,12.421 h1
  text "V_AMP1_N" at 23.754,12.421 h1
  text "V_AMP2_N" at 38.254,12.421 h1
  text "AUPwSC" at 13.254,8.254 h1
  text "Low noise conditioning for 18-bit ADC" at 13.254,5.587 h1
  text "Designer: Mikolaj Pichita" at 13.254,2.587 h1
Bottom Overlay:
  drawing of 17 lines, arcs and shapes, not listed
Mechanical 1:
  the board outline again, w0.254